# EAGLE board Nusbio Thumb Drive (EAGLE 9.6.2)

Size 43 x 50 mm. Coordinates in mm from the lower left corner, seen from the top.
Outline: 0,0 43,0 43,50 0,50 0,0
Copper layers (1*16): Top 0.035mm / dielectric 1.5mm / Bottom 0.035mm
Design rules "default": minimum track width 10mil, minimum drill 24mil, track to track 8mil, track to pad 8mil, pad to pad 8mil, via to via 8mil, smd to smd 8mil, copper to edge 40mil, drill to drill 8mil, minimum pad ring 10mil, minimum via ring 8mil, stop-mask expansion 4mil, vias tented up to drill 0mil, thermal gap 10mil

## Footprints (pad centres in the part's own frame; a part is rotated, then mirrored left to right if it is on the bottom)
1206 = smd 1.6 x 1.803: A -1.422,0; C 1.422,0
1X10-BIG = drill 1.016 pad 1.778 octagon: 1 -11.43,0; 2 -8.89,0; 3 -6.35,0; 4 -3.81,0; 5 -1.27,0; 6 1.27,0; 7 3.81,0; 8 6.35,0; 9 8.89,0; 10 11.43,0
R1206 = smd 1.6 x 1.803: 1 -1.422,0; 2 1.422,0
SO-08 = smd 0.6 x 2.2: 1 -1.905,-2.6; 2 -0.635,-2.6; 3 0.635,-2.6; 4 1.905,-2.6; 5 1.905,2.6; 6 0.635,2.6; 7 -0.635,2.6; 8 -1.905,2.6
SOLDERJUMPER_REFLOW = smd 1.168 x 1.6: 1 -0.762,0; 2 0.762,0

## Placement (x,y rotation side)
LED_POWER  [1206]  39,34 0 top
NUSBIO_IN  PINHD-1X10  [1X10-BIG]  20.33,2 180 top
NUSBIO_OUT  PINHD-1X10  [1X10-BIG]  20.33,48.09 180 top
R_1K  [R1206]  38,21 0 top
SPI_SOIC_FLASH  25AA080SN  [SO-08]  20,21 270 top
WRITE_ENABLE  [SOLDERJUMPER_REFLOW]  3,20.5 270 top

## Library data of the parts
LED_POWER NUSBIO_IN NUSBIO_OUT R_1K = adafruit
SPI_SOIC_FLASH = microchip; MF: MICROCHIP; MPN: 25AA080/SN; OC_FARNELL: 1816072; OC_NEWARK: 92C7351
WRITE_ENABLE = microbuilder

## Nets
CS: NUSBIO_IN.4 NUSBIO_OUT.4 SPI_SOIC_FLASH.1
GND: NUSBIO_IN.10 NUSBIO_OUT.10 R_1K.1 SPI_SOIC_FLASH.4
GPIO5: NUSBIO_IN.5 NUSBIO_OUT.5
GPIO6: NUSBIO_IN.6 NUSBIO_OUT.6
GPIO7: NUSBIO_IN.7 NUSBIO_OUT.7
GPIO8: NUSBIO_IN.8 NUSBIO_OUT.8
MISO: NUSBIO_IN.3 NUSBIO_OUT.3 SPI_SOIC_FLASH.2
MOSI: NUSBIO_IN.2 NUSBIO_OUT.2 SPI_SOIC_FLASH.5
N$1: SPI_SOIC_FLASH.3 WRITE_ENABLE.2
N$2: LED_POWER.C R_1K.2
SCK: NUSBIO_IN.1 NUSBIO_OUT.1 SPI_SOIC_FLASH.6
VCC: LED_POWER.A NUSBIO_IN.9 NUSBIO_OUT.9 SPI_SOIC_FLASH.7 SPI_SOIC_FLASH.8 WRITE_ENABLE.1

## Tracks (layer width: path | path; a pad name or v marks a point on that pad's centre or on a via)
CS  (2 unrouted)
GND  (3 unrouted)
GPIO5  (1 unrouted)
GPIO6  (1 unrouted)
GPIO7  (1 unrouted)
GPIO8  (1 unrouted)
MISO  (2 unrouted)
MOSI  (2 unrouted)
N$1  (1 unrouted)
N$2  (1 unrouted)
SCK  (2 unrouted)
VCC  (5 unrouted)

## Text on the board
tNames: 7 | 6 | 5 | 4 | GND | VCC | 3 NA | 2 MISO | 1 MOSI | 0 CLCK | + | Nusbio Thumb Drive | CS | VCC | MISO | HOLD | WP | CLK | GND | MOSI | GND | VCC | 7 | 6 | 5 | 4 | 3 CS | 2 MISO | 1 MOSI | 0 CLCK
bNames: MadeInTheUSB.net